# EAGLE board battery_contact (EAGLE 9.5.1)
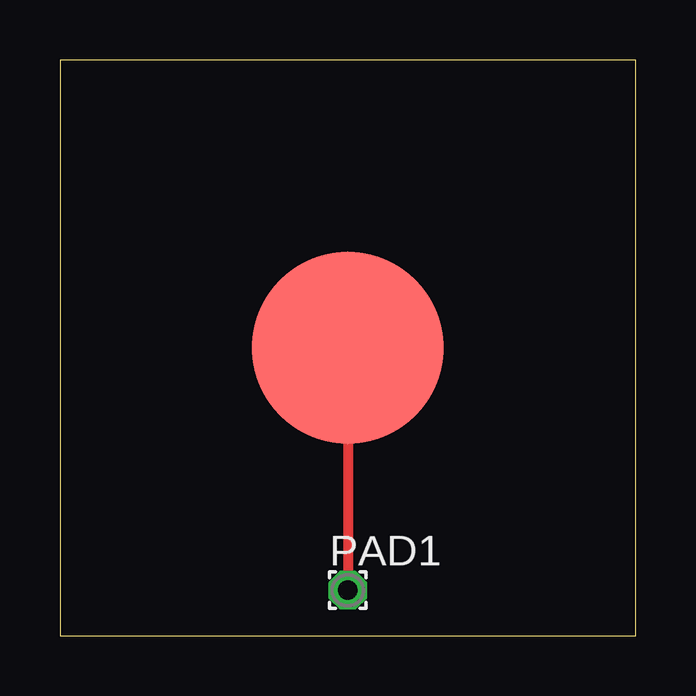
[diagram p0: board, top side]

Size 24 x 24 mm. Coordinates in mm from the lower left corner, seen from the top.
Outline: 0,0 24,0 24,24 0,24 0,0
Copper layers (1*16): Top 0.035mm / dielectric 1.5mm / Bottom 0.035mm
Design rules "default": minimum track width 6mil, minimum drill 0.35mm, track to track 6mil, track to pad 6mil, pad to pad 6mil, via to via 6mil, smd to smd 6mil, copper to edge 40mil, drill to drill 6mil, minimum pad ring 10mil, minimum via ring 8mil, stop-mask expansion 4mil, vias tented up to drill 0mil, thermal gap 10mil

## Footprints (pad centres in the part's own frame; a part is rotated, then mirrored left to right if it is on the bottom)
1,6/0,8 = drill 0.813 pad 1.6 octagon: 1 0,0
CONTACT_REGION = smd 8 x 8: P$1 0,0

## Placement (x,y rotation side)
PAD1  [1,6/0,8]  12,1.89 0 top
U$1  CONTACT_REGION  [CONTACT_REGION]  12,12 0 top

## Library data of the parts
PAD1 = wirepad
U$1 = custom_library

## Nets
N$1: PAD1.1 U$1.P$1

## Tracks (layer width: path | path; a pad name or v marks a point on that pad's centre or on a via)
N$1
  Top 0.406: U$1.P$1 PAD1.1